# Altium PCB L5_Interface_V1.0.PcbDoc
Units mm, origin at the board's own origin, x right, y up, seen from the top; angles counter-clockwise.
Board outline 90 x 52 mm, 2 copper layers (Top Layer, Bottom Layer); 49 components, 37 nets, 236 pads, 240 vias.
Unrouted connection lines stored in the file: 1.
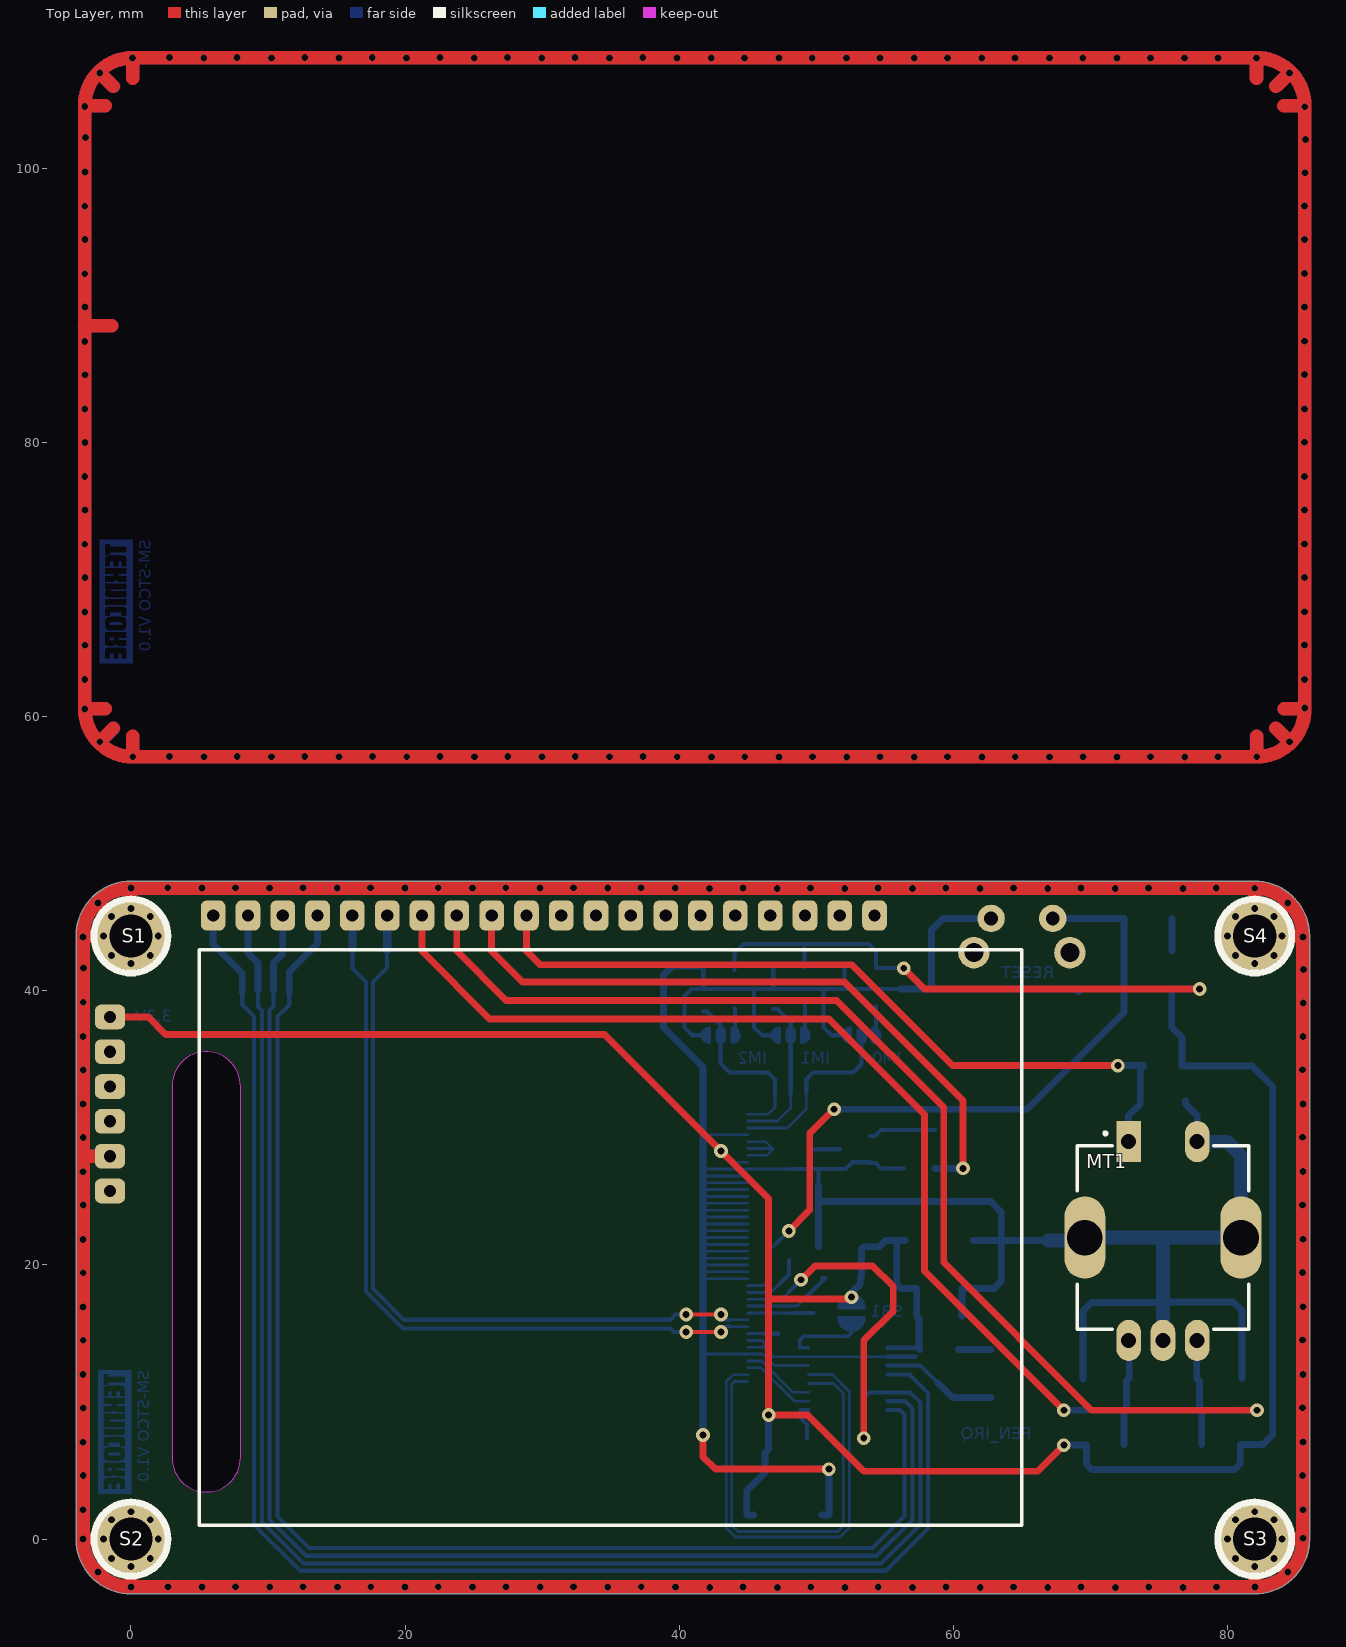
[diagram p0: Top Layer view]
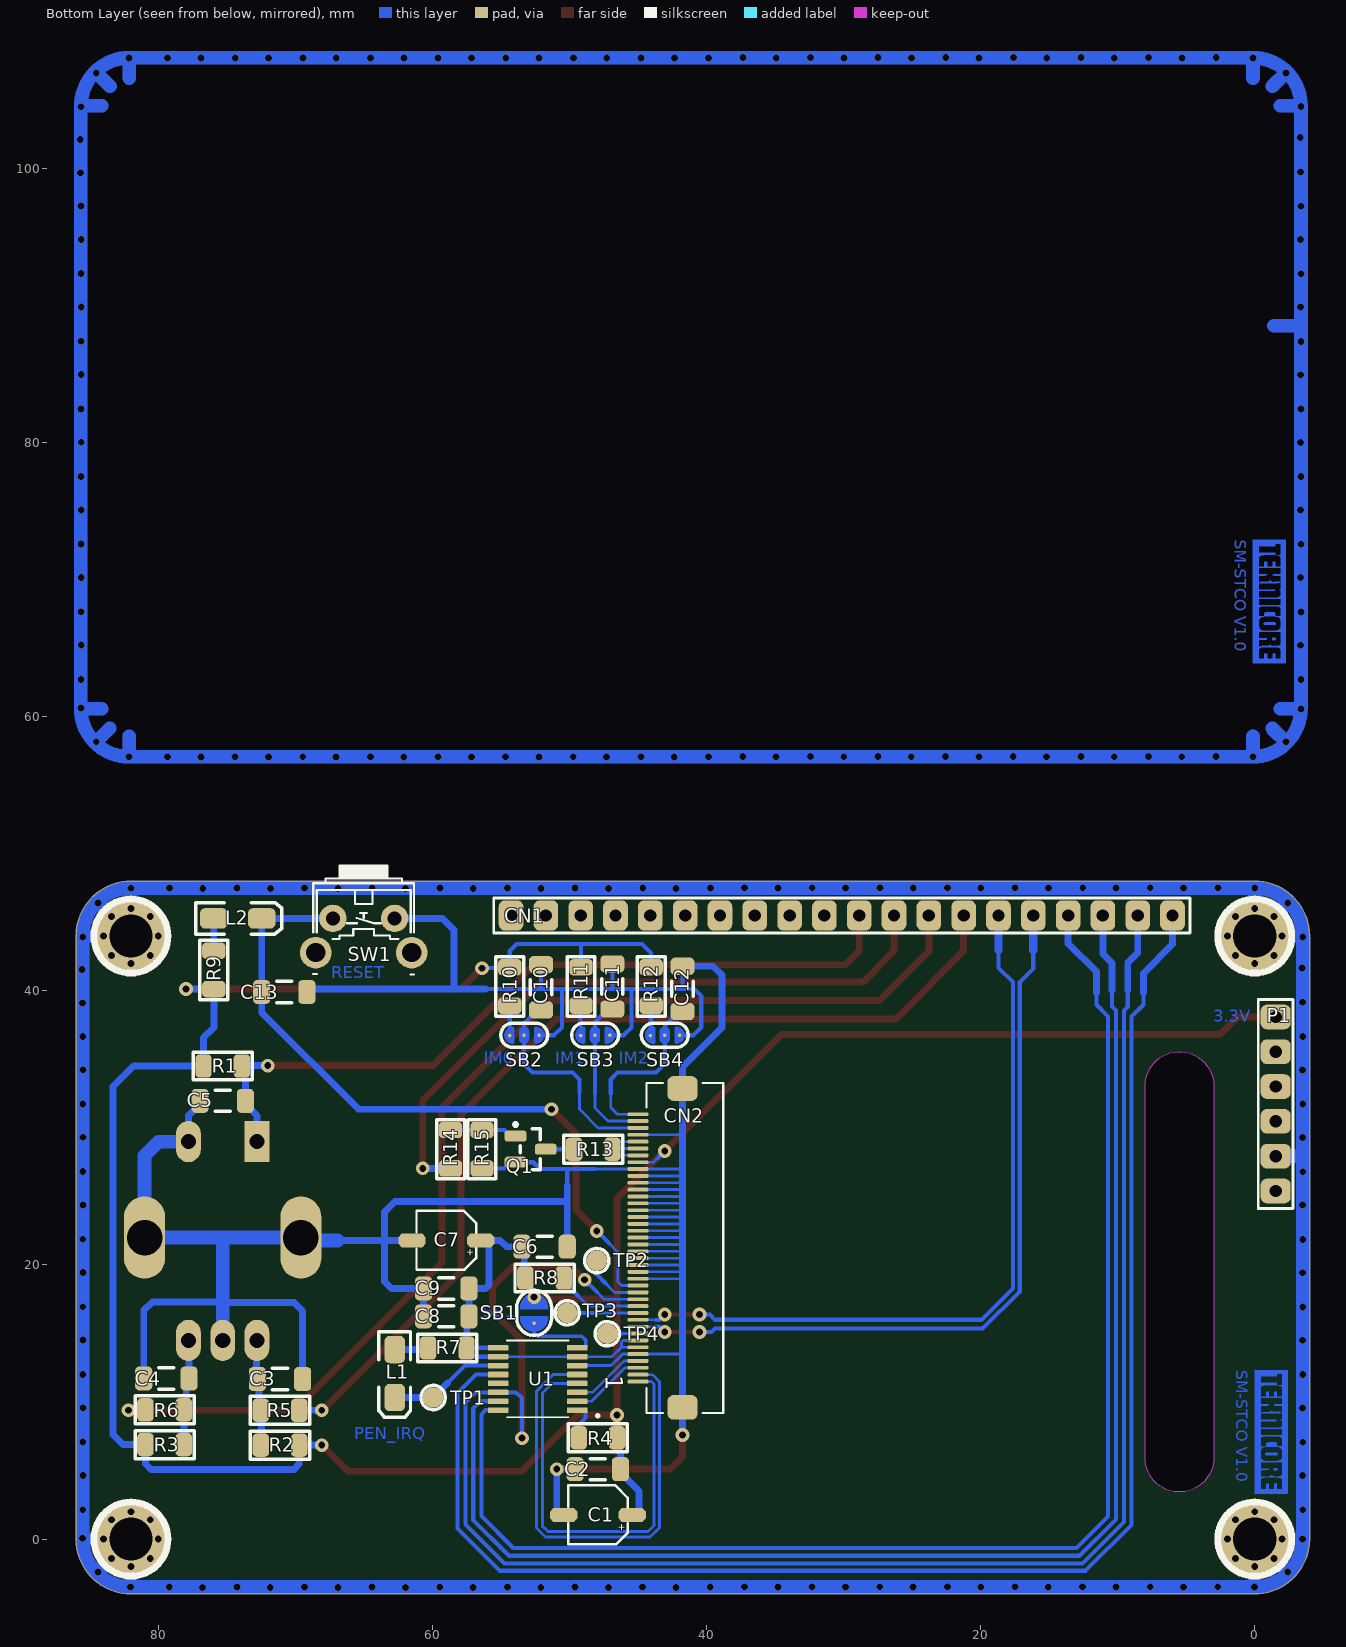
[diagram p1: Bottom Layer view, seen from below]

## Layer stack, top to bottom
Top Solder: solder mask 0.0102, Solder Resist, Dk 3.5
Top Layer: signal copper 0.0356
Dielectric 1: dielectric 0.32, FR-4, Dk 4.8
Bottom Layer: signal copper 0.0356
Bottom Solder: solder mask 0.0102, Solder Resist, Dk 3.5

## Board outline
-4,0 ccw(c0,0) 0,-4 82,-4 ccw(c82,0) 86,0 86,44 ccw(c82,44) 82,48 0,48 ccw(c0,44) -4,44
cut-out: 3,6 ccw(c5.5,5.935) 8,6 8,33 ccw(c5.5,33.065) 3,33

## Design rules (kind name [scope] priority, off if disabled: settings)
Clearance Clearance_1 [All] p1: gap=0.2 ignorepadtopadclearanceinfootprint=FALSE
Clearance [All] p2: gap=0.2 ignorepadtopadclearanceinfootprint=FALSE
PolygonConnect [All] p1: connectstyle=Relief reliefconductorwidth=0.254 reliefentries=4 polygonreliefangle="90 Angle" airgapwidth=0.254
RoutingVias [All] p1: holewidth=0.711 width=1.27 viastyle="Through Hole" minholewidth=0.5 minwidth=0 maxholewidth=0.711 maxwidth=1.27
SolderMaskExpansion [All] p1: expansion=0.102 istentingtop=FALSE
UnConnectedPin [All] p1:
Width [All] p1: maxlimit=5 minlimit=0.2 preferedwidth=0.3
30 further rules are at their usual default settings.

## Components (designator, comment, footprint, x,y, rotation, side; value= is the part's Value field where it differs from the comment)
C1 "10uF/25V" CAP_EL_B 48.273,1.549 r270 bottom
C2 "100nF" CAP1206 47.93,5.105 r180 bottom
C3 "10nF" CAP1206 71.12,11.684 r0 bottom
C4 "10nF" CAP1206 79.413,11.722 r180 bottom
C5 "10nF" CAP1206 75.3,31.979 r180 bottom
C6 "100nF" CAP1206 51.816,21.336 r0 bottom
C7 "10uF/25V" CAP_EL_B 59.33,21.59 r270 bottom
C8 "100nF" CAP1206 58.987,16.256 r180 bottom
C9 "100nF" CAP1206 58.987,18.288 r180 bottom
C10 "100nF" CAP1206 52.07,40.259 r270 bottom
C11 "100nF" CAP1206 46.871,40.321 r270 bottom
C12 "100nF" CAP1206 41.758,40.145 r270 bottom
C13 "100nF" CAP1206 70.806,39.919 r0 bottom
CN1 "Header Male 1x20" "HDR_M_1x20PIN_0.2\"" 30.13,45.5 r0 bottom
CN2 "TFT Display 2.4 inch" "FPC_CONNECTOR HIROSE_FH12A-40S-0.5SH(55)" 43.374,21.246 r270 bottom
L1 "RED" "LED 1206" 62.749,12.081 r270 bottom
L2 "Red" "LED 1206" 74.203,45.29 r180 bottom
MT1 "PEC11R_Rotary Encoder" "PEC11R_Rotary Encoder" 75.3,22 r0 top
P1 "Header Male 1x6" "HDR_M_1X6PIN_0.2\"" -1.524,38.1 r270 bottom
Q1 "SS8050" SOT23_M 52.832,28.448 r180 bottom
R1 "10R" Resistor_SMD_1206 75.3,34.519 r0 bottom
R2 "10R" Resistor_SMD_1206 71.12,6.858 r180 bottom
R3 "10R" Resistor_SMD_1206 79.537,6.896 r0 bottom
R4 "10R" Resistor_SMD_1206 47.93,7.391 r180 bottom
R5 "0R" Resistor_SMD_1206 71.12,9.398 r0 bottom
R6 "0R" Resistor_SMD_1206 79.537,9.436 r180 bottom
R7 "82R" Resistor_SMD_1206 58.912,13.941 r180 bottom
R8 "10K" Resistor_SMD_1206 51.816,19.05 r0 bottom
R9 "82R" Resistor_SMD_1206 75.946,41.526 r270 bottom
R10 "10K" Resistor_SMD_1206 54.356,40.321 r90 bottom
R11 "10K" Resistor_SMD_1206 49.157,40.321 r90 bottom
R12 "10K" Resistor_SMD_1206 44.044,40.321 r90 bottom
R13 "47R" Resistor_SMD_1206 48.26,28.448 r180 bottom
R14 "1K" Resistor_SMD_1206 58.674,28.448 r270 bottom
R15 "10K" Resistor_SMD_1206 56.388,28.448 r90 bottom
S1 "Screw" "SCREW 3MM-INVIRONS 0.254MM" 0,44 r0 top
S2 "Screw" "SCREW 3MM-INVIRONS 0.254MM" 0,0 r0 top
S3 "Screw" "SCREW 3MM-INVIRONS 0.254MM" 82,0 r0 top
S4 "Screw" "SCREW 3MM-INVIRONS 0.254MM" 82,44 r0 top
SB1 "Solder Bridge" "SolderBridge_NC (100x80)(20)mil" 52.578,16.51 r270 bottom
SB2 "Solder Bridge" "SOLDERBRIDGE_SMALL_NC_3PIN (70X50)(20)MIL" 53.315,36.765 r0 bottom
SB3 "Solder Bridge" "SOLDERBRIDGE_SMALL_NC_3PIN (70X50)(20)MIL" 48.141,36.765 r0 bottom
SB4 "Solder Bridge" "SOLDERBRIDGE_SMALL_NC_3PIN (70X50)(20)MIL" 43.053,36.765 r0 bottom
SW1 "Push Button" SW_PushBotton_Right 65.012,45.29 r0 bottom
TP1 "Test Point" TestPoint_SMD_Circle_1.5mm 59.944,10.331 r180 bottom
TP2 "Test Point" TestPoint_SMD_Circle_1.5mm 48.006,20.32 r180 bottom
TP3 "Test Point" TestPoint_SMD_Circle_1.5mm 50.165,16.51 r180 bottom
TP4 "Test Point" TestPoint_SMD_Circle_1.5mm 47.244,14.986 r180 bottom
U1 "XPT2046" TSSOP16 52.324,11.684 r0 bottom

## Footprints (in the part's own frame and the unit in brackets; to place one, negate y for a bottom-side part, rotate by r counter-clockwise, add the part's x,y. Pads: shape width x height; smd on the part's side, far side on the other; paste and mask are expansions set on the pad)
CAP1206 [mm] "Chip Capacitor, 2-Leads, Body 3/20x1/60mm, IPC Medium Density DESIGNER:ABBAS BASEREH"
  rrect50% 1.25x1.75 smd: 1(-1.651,0) 2(1.651,0)
  silkscreen extent -0.55,-0.77 0.55,0.77, body extent -1.65,-0.85 1.65,0.85, height 0.94
CAP_EL_B [mm] "83x83mm"
  oct 1x2 smd: 1(-0.203,2.845) 2(-0.203,-2.159)
  silkscreen extent -2.37,-1.83 1.93,2.51, body extent -2.35,-1.98 1.95,2.62, height 5.4
"FPC_CONNECTOR HIROSE_FH12A-40S-0.5SH(55)" [mil]
  rrect50% 11x59 smd: 1(384,-64) 2(364.03,-64) 3(344.35,-64) 4(324.66,-64) 5(304.98,-64) 6(285.29,-64) 7(265.61,-64) 8(245.92,-64) 9(226.24,-64) 10(206.55,-64) 11(186.87,-64) 12(167.18,-64) 13(147.5,-64) 14(127.81,-64) 15(108.13,-64) 16(88.44,-64) 17(68.76,-64) 18(49.07,-64) 19(29.39,-64) 20(9.7,-64) 21(-9.98,-64) 22(-29.67,-64) 23(-49.35,-64) 24(-69.04,-64) 25(-88.72,-64) 26(-108.41,-64) 27(-128.09,-64) 28(-147.78,-64) 29(-167.46,-64) 30(-187.15,-64) 31(-206.83,-64) 32(-226.52,-64) 33(-246.2,-64) 34(-265.89,-64) 35(-285.57,-64) 36(-305.26,-64) 37(-324.94,-64) 38(-344.63,-64) 39(-364.32,-64) 40(-384,-64)
  rrect50% 71x87 smd: 41(-458,64) 42(458,64)
  silkscreen extent -474,-39 474,181, body extent -482,-69 482,207, height 80
"HDR_M_1X6PIN_0.2\"" [mm] "6 row, straight, gold plating"
  rrect50% 1.8x2.2 hole 0.9: 1(0,0) 2(2.54,0) 3(5.08,0) 4(7.62,0) 5(10.16,0) 6(12.7,0)
  silkscreen extent -1.27,-1.27 13.97,1.27, body extent -1.28,-1.38 13.96,1.54, height 8.61
"HDR_M_1x20PIN_0.2\"" [mm] "2.00 mm THT Pin Header, 20p"
  rrect50% 1.8x2.2 hole 0.9: 1(-24.13,0) 2(-21.59,0) 3(-19.05,0) 4(-16.51,0) 5(-13.97,0) 6(-11.43,0) 7(-8.89,0) 8(-6.35,0) 9(-3.81,0) 10(-1.27,0) 11(1.27,0) 12(3.81,0) 13(6.35,0) 14(8.89,0) 15(11.43,0) 16(13.97,0) 17(16.51,0) 18(19.05,0) 19(21.59,0) 20(24.13,0)
  silkscreen extent -25.4,-1.27 25.4,1.27, body extent -25.39,-1.27 25.4,1.26, height 8.51
"LED 1206" [mm]
  rrect50% 2x1.5 smd: A(-1.75,0) K(1.75,0)
  silkscreen extent -3.05,-1.15 3.2,1.15, body extent -1.65,-0.72 1.65,0.73, height 1.36
"PEC11R_Rotary Encoder" [mm]
  oval 1.8x3 hole 1.1: 1(-2.5,-7.5) 2(0,-7.5) 3(2.5,-7.5) 5(2.5,7)
  rect 1.8x3 hole 1.1: 4(-2.5,7)
  oval 3x6 hole 2.6: S1(-5.7,0) S2(5.7,0)
  silkscreen extent -6.25,-6.7 6.25,7.7, body extent -6.92,-7.6 6.92,7.1, height 21
Resistor_SMD_1206 [mm]
  rrect50% 1.2x1.7 smd: 1(-1.4,0) 2(1.4,0)
  silkscreen extent -2.16,-1.02 2.16,1.02, body extent -1.52,-0.76 1.52,0.76, height 0.6
"SCREW 3MM-INVIRONS 0.254MM" [mm]
  round 0.5 hole 0.5: S(-2,0) S(-1.414,-1.414) S(-1.414,1.414) S(0,-2) S(0,2) S(1.414,-1.414) S(1.414,1.414) S(2,0)
  round 5 hole 3.15 mask+0.1: S(0,0)
  silkscreen extent -2.7,-2.7 2.7,2.7, body extent -2.8,-2.8 2.8,2.8, height 2.58
"SolderBridge_NC (100x80)(20)mil" [mil]
  round 10 smd: 1(-30,0) 2(30,0)
  round 81 on Bottom Solder mask+0: 5(-15,0) 6(15,0)
  Top Layer region: 10,-40 15,-40 30.31,-36.96 43.28,-28.28 51.96,-15.31 55,0 55,0 51.96,15.31 43.28,28.28 30.31,36.96 15,40 15,40 10,40
  Top Layer region: -10,40 -15,40 -30.31,36.96 -43.28,28.28 -51.96,15.31 -55,0 -55,0 -51.96,-15.31 -43.28,-28.28 -30.31,-36.96 -15,-40 -15,-40 -10,-40
  silkscreen extent -65,-50 65,50
"SOLDERBRIDGE_SMALL_NC_3PIN (70X50)(20)MIL" [mil]
  round 10 smd mask+0: 1(-43,0) 2(0,0) 3(41,1)
  round 51 on Bottom Solder mask+0: 3(-33,0) 4(0,0) 4(32,0)
  Top Layer region: -10.02,20.08 -2.37,18.56 4.12,14.22 8.45,7.74 9.98,0.08 9.98,0.08 8.45,-7.57 4.12,-14.06 -2.37,-18.4 -10.02,-19.92 -10.02,-19.92
  Top Layer region: 32,20 39.65,18.48 46.14,14.14 50.48,7.65 52,0 52,0 50.48,-7.65 46.14,-14.14 39.65,-18.48 32,-20 32,-20
  Top Layer region: -33,20 -40.65,18.48 -47.14,14.14 -51.48,7.65 -53,0 -53,0 -51.48,-7.65 -47.14,-14.14 -40.65,-18.48 -33,-20 -33,-20
  Top Layer lines w10: -53,0 ccw(c-33,0) -33,-20 -33,0 -33,20 ccw(c-33,0) -53,0 ; -10.02,10.16 cw(c0,10.16) 0,20.19 cw(c0,10.16) 10.02,10.16 10.02,0 10.02,-10 cw(c0,-10) 0,-20.02 cw(c0,-10) -10.02,-10 -10.02,0 -10.02,10.16 ; 32,20 cw(c32,0) 41,-17.86 cw(c32,0) 32,-20 32,1 32,20
  silkscreen extent -68,-35 67,35
SOT23_M [mm] "SOT23, 3-Leads, Body 2.9x1.3mm, Pitch 0.95mm, Lead Span 2.3mm, IPC Low Density"
  rrect50% 1.6x0.8 smd: 1(-1.1,0.95) 2(-1.1,-0.95) 3(1.1,0)
  silkscreen extent -1.23,-1.5 0.7,1.92, body extent -1.27,-1.5 1.27,1.5, height 1.1
SW_PushBotton_Right [mm] "Horizontal 6.0mm Square Type (Snap-in) SKHH Series; Stem length 3.85 mm ; 1,000,000 cycles ; 0.98N Force"
  round 2 hole 1.016: 1(-2.25,0) 2(2.25,0)
  round 2.3 hole 1.397: MH(-3.5,2.5) MH(3.5,2.5)
  silkscreen extent -3.68,-3.85 3.68,4.09, body extent -4.25,-3.86 4.25,4.04, height 7.43
TestPoint_SMD_Circle_1.5mm [mm]
  round 1.5 smd: 1(0,0)
  silkscreen extent -0.89,-0.89 0.89,0.89
TSSOP16 [mm]
  rrect25% 1.5x0.41 smd: 1(-2.885,2.275) 2(-2.885,1.625) 3(-2.885,0.975) 4(-2.885,0.325) 5(-2.885,-0.325) 6(-2.885,-0.975) 7(-2.885,-1.625) 8(-2.885,-2.275) 9(2.885,-2.275) 10(2.885,-1.625) 11(2.885,-0.975) 12(2.885,-0.325) 13(2.885,0.325) 14(2.885,0.975) 15(2.885,1.625) 16(2.885,2.275)
  silkscreen extent -4.48,-2.8 2.25,2.8, body extent -3.2,-2.5 3.2,2.5, height 1.1

## Part data
C1 C7: library part "Capacitor Electorolytic", "Capacitor Electorolytic"
C2 C3 C4 C5 C6 C8 C9 C10 C11 C12 C13: library part "Capacitor Poliester & Ceramic", "Capacitor Poliester & Ceramic"
CN2: "TFT Display 2.4 inch SPI TFT LCD color screen ILI9341 driver"
L1 L2: library part LED, "LED"
MT1: "Incremental Encoder, 12 Mm, Contact Rating 10 Ma - 5 Vdc", Package=None, Availability=Unavailable, MP=PEC11R-4215F-S0024, Price=None
Q1: "SS8050-G (NPN)"
R1 R2 R3 R4 R5 R6 R7 R8 R9 R10 R11 R12 R13 R14 R15: library part Resistor, "Resistor"
SB1: library part "Solder Bridge Short (NC)", "Solder Bridge Jumper"
SB2 SB3 SB4: library part "Solder Bridge Short 3Pin (NC)", "Solder Bridge Jumper"
SW1: library part "Push Button 4PIN Right", "Push Button 4PIN Right"
TP1 TP2 TP3 TP4: library part TestPoint
U1: "driver IC XPT2046 touch screen controller components"

## Free pads (board coordinates)
  round 1.5 on Mech1: 28(0,44) 28(0.127,104.579) 29(0,0) 29(0.127,60.579) 30(82,0) 30(82.127,60.579) 31(82,44) 31(82.127,104.579) 32(-1.524,38.1) 32(-1.397,98.679) 32(1.27,38.1) 32(1.397,98.679) 32(6.02,42.697) 32(6.147,103.276) 33(6,45.5) 33(6.127,106.079)

## Via types
v1: diameter 0.5, hole 0.5, Top Layer to Bottom Layer, tented both sides, 220 vias
v2: diameter 1, hole 0.5, Top Layer to Bottom Layer, 20 vias

## Nets (pads, with @x,y where several pads share a name; then routed paths per layer and width w, separated by ;. In a path a pad name is that pad's centre, name@x,y a point inside that pad or via, vN(x,y) a via of type N, cw(c..) or ccw(c..) an arc to the next point about the centre after c; other vN are vias at no path point)
+3.3: C1.1 C2.2 C6.2 C7.1 C8.2 C9.2 CN2.6 CN2.7 CN2.33 P1.1 R1.2 R2.2 R3.2 R4.2 R7.2 R8.2 R9.2 R10.2 R11.2 R12.2 SB1.1 U1.7 U1.9 U1.10 | length 241.8
  Top Layer w0.5: P1.1 1.27,38.1 2.54,36.83 34.544,36.83 v2(43.053,28.321) 46.53,24.844 46.53,17.526 ; v2(52.578,17.653) 52.451,17.526 46.53,17.526 ; v2(56.388,41.656) 57.912,40.132 v2(77.978,40.132) ; v2(68.072,6.858) 66.167,4.953 53.467,4.953 49.369,9.051 v2(46.53,9.051) 46.53,17.526
  Bottom Layer w0.2: 43.561,27.813 43.874,27.5 CN2.33 ; CN2.6 46.198,14 ; CN2.7 46.079,14.5 46.198,14.381 46.198,14 ; U1.10 U1.7 46.889,13.309 46.198,14
  Bottom Layer w0.254: v2@52.578,17.399 v2(52.578,17.653)
  Bottom Layer w0.3: v2(43.053,28.321) 43.561,27.813 ; R12.2@44.044,41.545 44.044,42.774 44.704,43.434 49.022,43.434 ; R11.2 49.157,43.299 49.022,43.434 ; U1.10 R7.2@57.257,13.309 ; U1.9 R7.2@57.257,13.959 ; v2(56.388,41.656) 56.385,41.659 54.356,41.659 54.356,42.926 53.848,43.434 49.022,43.434
  Bottom Layer w0.5: C1.1 44.933,1.753 44.933,3.509 46.279,4.855 C2.2 46.279,6.29 46.53,6.541 R4.2 v2(46.53,9.051) ; v2(52.578,17.653) 52.578,17.988 53.216,18.626 R8.2 ; R8.2@53.296,19.13 53.296,21.165 C6.2 54.61,21.336 55.067,21.793 55.626,21.793 C7.1@55.88,21.793 ; C7.1 C7.1@55.88,21.793 ; R7.2@57.587,13.829 57.496,13.92 57.496,16.097 C8.2 C9.2 56.134,18.288 55.88,18.542 C7.1@55.88,21.793 ; v2(68.072,6.858) R2.2 69.72,5.464 70.104,5.08 80.518,5.08 80.937,5.499 R3.2 82.588,6.896 83.312,7.62 83.312,33.02 81.813,34.519 R1.2 76.7,36.584 75.946,37.338 R9.2 77.972,40.126 v2(77.978,40.132)
BL_CTR: CN1.9 R14.2 | length 48.5
  Top Layer w0.5: CN1.9 26.32,42.895 28.562,40.653 52.057,40.653 60.706,32.004 v2(60.706,27.051)
  Bottom Layer w0.5: R14.2 58.677,27.051 v2(60.706,27.051)
GND: C1.2 C2.1 C3.1 C4.1 C5.1 C6.1 C7.2 C8.1 C9.1 C10.1 C11.1 C12.1 C13.1 CN2.5 CN2.16 CN2.17 CN2.18 CN2.19 CN2.20 CN2.21 CN2.22 CN2.23 CN2.24 CN2.25 CN2.26 CN2.27 CN2.28 CN2.29 CN2.30 CN2.31 CN2.32 CN2.37 CN2.41 CN2.42 MT1.2 MT1.5 MT1.S1 MT1.S2 P1.5 Q1.2 R15.1 S1.S S2.S S3.S S4.S SB2.1 SB3.1 SB4.1 SW1.1 U1.6 | length 867.7
  Top Layer w0.5: v2(41.749,7.601) 41.749,6.003 42.647,5.105 v2(50.927,5.105)
  Top Layer w1: v1(-2.402,-2.402) S2.S@-1.414,-1.414 ; v1(-2.402,46.402) S1.S@-1.414,45.414 ; S1.S@-2,44 v1@-3.498,44 ; S2.S@-1.991,0 v1(-3.489,0) ; P1.5 -3.498,27.94 ; S1.S@0,46 v1(0,47.498) ; S2.S@0.009,-2 v1(0.009,-3.498) ; S4.S@82,46 v1(82,47.489) v1@82,47.498 ; v1@82.018,-3.489 S3.S@82.018,-1.991 ; S3.S@83.414,-1.414 v1(84.402,-2.402) v1@84.565,-2.402 ; S4.S@83.414,45.414 v1(84.402,46.402) ; S4.S@84,44 v1@85.498,44 ; S3.S@84.018,0.009 v1@85.516,0.009 ; v1(85.516,43.934) ccw(c82.009,43.991) 82.009,47.498 v1@82,47.498 ; v1@85.525,43.943 85.525,36.683 85.525,34.249 85.525,26.816 85.525,16.949 85.525,7.081 v1(85.525,0.066) cw(c82.018,0.009) v1@84.565,-2.402 ; -3.498,27.94 -3.498,41.674 v1(-3.498,43.943) cw(c0,44) v1@-3.498,44 ; -3.498,27.94 -3.498,21.873 -3.498,7.072 -3.498,0.066 -3.489,0.057 ccw(c0.009,0) v1(-3.489,0) ; v1@-3.498,44 cw(c0,44) v1(0,47.498) ; v1(-3.489,0) ccw(c0.009,0) v1(0.009,-3.498) ; v1(0,47.498) v1(5.188,47.498) v1(15.055,47.498) v1(24.922,47.498) v1(29.855,47.498) v1(34.789,47.498) v1(44.656,47.498) 57.023,47.498 v1(64.391,47.498) 71.824,47.498 v1@82,47.498 ; v1(0.009,-3.498) 7.63,-3.498 12.564,-3.498 17.497,-3.498 v1(19.997,-3.498) v1(29.865,-3.498) 32.298,-3.498 v1(39.732,-3.498) v1(44.665,-3.498) 52.099,-3.498 v1(59.466,-3.498) v1(64.4,-3.498) v1(74.267,-3.498) 76.767,-3.498 v1(82.018,-3.498) ccw(c82.018,0.009) v1@84.565,-2.402
  Bottom Layer w0.2: 41.749,13.5 CN2.5 46.117,13.5 46.217,13.4 46.221,13.4 46.962,12.659 U1.6 ; 41.749,19 CN2.16 ; 41.749,19.5 CN2.17 ; 41.749,20 CN2.18 ; 41.749,20.5 CN2.19 ; 41.749,21 CN2.20 ; 41.749,21.5 CN2.21 ; 41.749,22 CN2.22 ; 41.749,22.5 CN2.23 ; 41.749,23 CN2.24 ; 41.749,23.5 CN2.25 ; 41.749,24 CN2.26 ; 41.749,24.5 CN2.27 ; 41.749,25 CN2.28 ; 41.749,25.5 CN2.29 ; 41.749,26 CN2.30 ; 41.749,26.5 CN2.31 ; 41.749,27 CN2.32 48.184,27 ; 41.749,29.5 CN2.37
  Bottom Layer w0.3: 41.707,36.765 40.959,36.765 40.386,37.338 40.386,39.624 40.894,40.132 41.758,40.132 ; 41.711,36.83 SB4.1@41.939,36.83 ; C12.1 41.758,40.132 ; C11.1 46.871,40.14 46.863,40.132 ; SB3.1 46.795,36.765 46.039,36.765 45.466,37.338 45.466,40.132 ; 48.184,27 50.165,27 ; 50.165,25.819 50.165,27 ; 51.968,36.765 51.119,36.765 50.546,37.338 50.546,40.132 ; 51.974,36.69 SB2.1@52.222,36.69 ; C10.1 52.07,40.132 ; 56.134,40.132 52.07,40.132 ; R15.1 54.74,27.048 54.356,27.432 53.998,27.432 Q1.2 52.644,27.498 52.146,27 50.165,27 ; 41.758,40.132 45.466,40.132 ; 45.466,40.132 46.863,40.132 ; 46.863,40.132 50.546,40.132 ; 50.546,40.132 52.07,40.132
  Bottom Layer w0.5: v2(41.749,7.601) CN2.42 41.749,13.5 41.749,19 41.749,19.5 41.749,20 41.749,20.5 41.749,21 41.749,21.5 41.749,22 41.749,22.5 41.749,23 41.749,23.5 41.749,24 41.749,24.5 41.749,25 41.749,25.5 41.749,26 41.749,26.5 41.749,27 41.749,29.5 CN2.41 41.749,34.451 38.862,37.338 38.862,41.148 39.51,41.796 C12.1 ; C2.1 v2(50.927,5.105) 50.927,1.753 C1.2 ; C6.1 50.165,24.638 ; 50.165,25.819 50.165,24.638 ; 56.134,40.132 58.42,40.132 ; C8.1 C9.1 62.992,18.288 63.5,18.796 63.5,21.793 ; C7.2 63.5,21.793 ; 62.738,47.498 62.762,47.474 ; SW1.1 59.26,45.29 58.42,44.45 58.42,40.132 ; 63.5,22.098 63.5,23.876 62.738,24.638 50.165,24.638 ; 66.929,21.793 63.5,21.793 ; C13.1 68.941,40.132 58.42,40.132 ; C3.1 69.469,16.637 70.104,17.272 75.184,17.272 ; 75.349,17.31 80.429,17.31 81.064,16.675 C4.1 ; C5.1 76.951,31.761 77.8,30.912 MT1.5
  Bottom Layer w1: -3.507,27.94 -3.498,27.94 ; v1@-2.384,-2.411 S2.S@-1.396,-1.423 ; v1@-2.384,46.411 S1.S@-1.396,45.423 ; S2.S@-2,0 v1(-3.489,0) ; S1.S@-2,44 -3.441,44 v1(-3.498,43.943) ; P1.5 -3.498,27.94 ; S2.S@0,-2 0,-3.489 v1(0.009,-3.498) ; S1.S@0,46 v1(0,47.498) ; 66.929,21.793 69.393,21.793 MT1.S1 75.3,22 ; MT1.2 75.3,22 ; MT1.5 79.966,29 81,27.966 MT1.S2 75.3,22 ; v1@82,-3.489 S3.S@82,-2 ; S4.S@82,46 v1(82,47.489) ; S4.S@83.396,45.423 v1@84.384,46.411 ; S3.S@83.414,-1.414 v1(84.402,-2.402) ; S3.S@84,0 v1@85.489,0 ; S4.S@84,44 v1@85.489,44 ; v1(85.516,43.934) ccw(c82.009,43.991) 82.009,47.498 82,47.498 76.758,47.498 v1(69.324,47.498) 62.738,47.498 52.09,47.498 v1(44.656,47.498) 37.223,47.498 27.355,47.498 v1(24.922,47.498) 12.555,47.498 v1(5.188,47.498) v1(0,47.498) ; v1@85.525,43.943 85.525,34.249 85.525,26.816 85.525,14.515 85.525,12.015 v1(85.525,0.066) cw(c82.018,0.009) v1(82.018,-3.498) v1(74.267,-3.498) 61.966,-3.498 v1(59.466,-3.498) v1(54.532,-3.498) v1(44.665,-3.498) v1(34.798,-3.498) v1(29.865,-3.498) v1(24.931,-3.498) 17.497,-3.498 12.564,-3.498 v1(5.197,-3.498) v1(0.009,-3.498) ; -3.498,27.94 -3.498,34.24 -3.498,39.174 v1(-3.498,43.943) ; -3.498,27.94 -3.498,19.439 -3.498,7.072 -3.498,2.139 -3.498,0.066 -3.489,0.057 ccw(c0.009,0) v1(-3.489,0) ; v1(-3.498,43.943) cw(c0,44) v1(0,47.498) ; v1(-3.489,0) ccw(c0.009,0) v1(0.009,-3.498)
  other v1: 42.232,-3.523 47.165,-3.523 52.099,-3.523 57.032,-3.523 61.966,-3.523 66.9,-3.523 71.833,-3.523 76.767,-3.523 10.13,-3.498 15.064,-3.498 49.599,-3.498 69.333,-3.498 79.2,-3.498 2.697,-3.473 7.63,-3.473 12.564,-3.473 17.497,-3.473 22.431,-3.473 27.365,-3.473 32.298,-3.473 37.232,-3.473 -3.496,2.139 85.514,2.148 -3.471,4.639 85.489,4.648 -3.496,7.072 85.514,7.081 -3.471,9.572 85.489,9.581 -3.496,12.006 85.514,12.015 -3.471,14.506 85.489,14.515 -3.496,16.939 85.514,16.949 -3.471,19.439 85.489,19.449 -3.496,21.873 85.514,21.882 -3.471,24.373 85.489,24.382 -3.496,26.807 85.514,26.816 -3.471,29.307 85.489,29.316 -3.496,31.74 85.514,31.749 -3.471,34.24 85.489,34.249 -3.496,36.674 85.514,36.683 85.539,39.117 -3.471,39.174 85.564,41.55 -3.446,41.674 42.223,47.473 47.156,47.473 52.09,47.473 57.023,47.473 61.957,47.473 66.891,47.473 71.824,47.473 76.758,47.473 10.121,47.498 19.988,47.498 39.723,47.498 49.59,47.498 54.523,47.498 59.457,47.498 74.258,47.498 79.191,47.498 2.688,47.523 7.621,47.523 12.555,47.523 17.488,47.523 22.422,47.523 27.355,47.523 32.289,47.523 37.223,47.523
IM0: C10.2 CN2.38 SB2.2 | length 15.6
  Bottom Layer w0.2: CN2.38 47.907,30 49.276,31.369 49.276,32.606
  Bottom Layer w0.3: 49.276,32.606 49.276,33.528 49.784,34.036 52.705,34.036 53.315,34.646 53.315,36.178 ; C10.2 52.324,38.608 53.315,37.617 53.315,37.199 SB2.2@53.315,36.69
IM1: C11.2 CN2.39 SB3.2 | length 10.9
  Bottom Layer w0.2: CN2.39 47.187,30.5 48.141,31.454 48.141,32.512
  Bottom Layer w0.3: C11.2 47.182,38.67 48.141,37.711 48.141,37.274 SB3.2 ; 48.141,32.512 48.141,36.253
IM2: C12.2 CN2.40 SB4.2 | length 12.6
  Bottom Layer w0.2: CN2.40 46.494,31 46.99,31.496 46.99,32.512
  Bottom Layer w0.3: C12.2 42.024,38.494 43.028,37.49 43.028,37.097 43.028,36.589 ; 43.028,36.076 43.028,34.696 43.688,34.036 46.482,34.036 46.99,33.528 46.99,32.512
"LCD_CSX / SPI CSX": CN1.5 CN2.9 | length 56.7
  Top Layer w0.3: v2@40.894,15.113 v2(43.053,15.113)
  Bottom Layer w0.2: 43.688,15.5 CN2.9
  Bottom Layer w0.3: 16.16,42.957 16.16,41.625 17.145,40.64 17.145,18.078 19.856,15.367 39.37,15.367 39.624,15.113 v2(40.513,15.113) ; v2(43.053,15.113) 43.44,15.5 43.688,15.5
  Bottom Layer w0.6: 16.16,42.957 CN1.5
"LCD_DCS / SPI SCL": CN1.6 CN2.10 | length 55.9
  Top Layer w0.3: v2@40.894,16.383 v2(43.053,16.383)
  Bottom Layer w0.2: 43.688,16 CN2.10
  Bottom Layer w0.3: 18.7,42.957 18.7,41.684 17.653,40.637 17.653,18.288 19.939,16.002 39.37,16.002 39.751,16.383 v2(40.513,16.383) ; v2(43.053,16.383) 43.436,16 43.688,16
  Bottom Layer w0.6: 18.7,42.957 CN1.6
LCD_RESET: C13.2 CN2.15 L2.K SW1.2 | length 52.3
  Top Layer w0.5: v2(48.006,22.479) 49.53,24.003 49.53,29.591 v2(51.308,31.369)
  Bottom Layer w0.2: CN2.15 46.186,18.5 46.482,18.796 46.482,20.955 47.117,21.59
  Bottom Layer w0.3: 47.117,21.59 v2(48.006,22.479)
  Bottom Layer w0.5: v2(51.308,31.369) 65.405,31.369 72.457,38.421 C13.2 72.453,39.923 L2.K ; SW1.2 L2.K@72.452,45.29
"LCD_SPI SDI / SDA": CN1.2 CN2.13 U1.14 | length 135.8
  Top Layer w0.5: v2(48.895,18.923) 49.911,19.939 54.102,19.939 55.626,18.415 55.626,16.637 53.467,14.478 v2(53.467,7.366)
  Bottom Layer w0.2: CN2.13 47.472,17.5 48.006,18.034
  Bottom Layer w0.3: 9.271,40.005 9.271,38.832 9.554,38.549 9.554,1.248 12.58,-1.778 54.737,-1.778 57.598,1.083 57.598,9.966 56.855,10.709 U1.14 53.889,10.709 53.467,10.287 v2(53.467,7.366) ; 48.006,18.034 v2(48.895,18.923)
  Bottom Layer w0.5: CN1.2 8.54,42.768 9.271,42.037 9.271,40.005
LCD_X+: CN2.3 U1.2 | length 5.5
  Bottom Layer w0.2: CN2.3 45.964,12.5 48.405,10.059 U1.2
LCD_X-: CN2.1 U1.4 | length 32.6
  Bottom Layer w0.2: CN2.1 44.03,11.493 43.834,11.297 43.834,0.997 44.284,0.547 51.576,0.547 51.968,0.94 51.968,7.391 51.968,10.661 51.271,11.359 U1.4
LCD_Y+: CN2.4 U1.3 | length 5.4
  Bottom Layer w0.2: CN2.4 46.03,13 48.321,10.709 U1.3
LCD_Y-: CN2.2 U1.5 | length 35.4
  Bottom Layer w0.2: CN2.2 43.953,12 43.434,11.481 43.434,0.831 44.118,0.147 51.742,0.147 52.409,0.815 52.409,10.786 51.186,12.009 U1.5
NetC3_2: C3.2 MT1.1 R2.1 R5.2 | length 7.8
  Bottom Layer w0.5: R2.1@72.463,6.896 72.463,9.436 72.644,9.617 72.644,11.528 72.838,11.722 72.838,14.462 MT1.1
NetC4_2: C4.2 MT1.3 R3.1 R6.2 | length 7.8
  Bottom Layer w0.5: MT1.3 77.762,14.462 C4.2 77.956,11.528 77.956,9.617 R6.2 R3.1
NetCN2_8: CN2.8 TP4.1 | length 2.2
  Bottom Layer w0.2: CN2.8 46.228,15
  Bottom Layer w0.3: 46.242,14.986 TP4.1
NetCN2_11: CN2.11 TP3.1 | length 4.8
  Bottom Layer w0.2: CN2.11 48.26,16.5
  Bottom Layer w0.3: 48.26,16.5 TP3.1@49.784,16.5
NetCN2_12: CN2.12 R8.1 | length 6.8
  Bottom Layer w0.2: CN2.12 48.616,17 49.336,17.72
  Bottom Layer w0.3: 49.336,17.72 50.666,19.05 R8.1
NetCN2_14: CN2.14 TP2.1 | length 4.6
  Bottom Layer w0.2: CN2.14 45.857,18 46.702,18 47.354,18.652
  Bottom Layer w0.3: 47.354,18.652 48.006,19.304 TP2.1
NetCN2_34: CN2.34 CN2.35 CN2.36 R13.2 | length 5.9
  Bottom Layer w0.2: CN2.34 46.412,28 R13.2 R13.2@46.808,28.5 ; CN2.35 R13.2@46.808,28.5 ; CN2.36 46.308,29 R13.2@46.808,28.5
NetL1_A: L1.A R7.1 | length 2.4
  Bottom Layer w0.5: R7.1@60.387,13.829 60.987,13.829 60.99,13.831 L1.A
NetL2_A: L2.A R9.1 | length 2.4
  Bottom Layer w0.5: R9.1 75.953,42.933 L2.A
NetQ1_1: Q1.1 R14.1 R15.2 | length 4.9
  Bottom Layer w0.3: Q1.1 54.29,29.398 54.74,29.848 R15.2 R14.1
NetQ1_3: Q1.3 R13.1 | length 2.1
  Bottom Layer w0.3: R13.1 Q1.3
NetR4_1: R4.1 U1.1 | length 2.8
  Bottom Layer w0.3: R4.1 49.33,8.363 48.844,8.848 48.844,9.409 U1.1
NetR10_1: R10.1 SB2.3@54.356,36.74 | length 2.2
  Bottom Layer w0.3: SB2.3@54.356,36.665 54.356,37.144 R10.1@54.356,38.859
NetR11_1: R11.1 SB3.3@49.183,36.74 | length 2.2
  Bottom Layer w0.3: R11.1 49.183,38.896 49.183,37.219 SB3.3@49.183,36.74
NetR12_1: R12.1 SB4.3@44.094,36.74 | length 2.2
  Bottom Layer w0.3: R12.1@44.044,38.745 44.069,38.719 44.069,37.042 44.069,36.563
NetSB1_2: SB1.2 U1.8 | length 6
  Bottom Layer w0.254: U1.8 48.817,13.959 48.817,14.527 49.092,14.802 52.324,14.802 52.578,15.056 52.578,15.621 52.578,15.875 52.527,15.875
ROT_CLK: CN1.7 R5.1 | length 71.7
  Top Layer w0.5: CN1.7 21.24,42.895 26.176,37.959 50.941,37.959 57.912,30.988 57.912,19.558 v2(68.072,9.398)
  Bottom Layer w0.5: v2(68.072,9.398) R5.1
ROT_DT: CN1.8 R6.1 | length 82.7
  Top Layer w0.5: CN1.8 23.78,42.895 27.369,39.306 51.499,39.306 59.309,31.496 59.309,20.193 70.104,9.398 v2(82.169,9.398)
  Bottom Layer w0.5: R6.1 80.975,9.398 v2(82.169,9.398)
ROT_SW: C5.2 CN1.10 MT1.4 R1.1 | length 57.1
  Top Layer w0.5: CN1.10 28.86,42.895 29.845,41.91 52.578,41.91 59.944,34.544 v2(72.009,34.544)
  Bottom Layer w0.5: v2(72.009,34.544) 73.875,34.544 R1.1 73.649,34.268 C5.2 73.649,31.739 72.8,30.89 MT1.4
T_CLK: CN1.4 U1.16 | length 101.5
  Bottom Layer w0.3: 11.557,39.878 11.557,39.243 11.557,38.989 10.697,38.129 10.697,1.664 12.996,-0.635 54.102,-0.635 56.43,1.693 56.43,9.102 56.123,9.409 U1.16
  Bottom Layer w0.5: 11.557,39.878 11.557,41.402 13.62,43.465 CN1.4
T_CS: CN1.3 U1.15 | length 103.7
  Bottom Layer w0.3: 10.414,40.005 10.414,38.876 10.117,38.579 10.117,1.446 12.778,-1.215 54.411,-1.215 57.024,1.398 57.024,9.519 56.484,10.059 U1.15
  Bottom Layer w0.5: 10.414,40.005 10.414,42.037 11.08,42.703 CN1.3
T_DO: CN1.1 U1.12 | length 110.9
  Bottom Layer w0.3: 8.128,39.878 8.128,38.989 8.995,38.122 8.995,1.038 12.337,-2.304 55.1,-2.304 58.166,0.762 58.166,10.668 56.825,12.009 U1.12
  Bottom Layer w0.5: CN1.1 6,43.403 8.128,41.275 8.128,39.878
T_IRQ: L1.K TP1.1 U1.11 | length 8.5
  Bottom Layer w0.3: U1.11 57.616,12.659 58.887,11.389
  Bottom Layer w0.5: 58.887,11.389 TP1.1 L1.K
pads on no net: CN1.11 CN1.12 CN1.13 CN1.14 CN1.15 CN1.16 CN1.17 CN1.18 CN1.19 CN1.20 P1.2 P1.3 P1.4 P1.6 SB1.5 SB1.6 SB2.3@52.476,36.765 SB2.4 SB3.3@47.303,36.765 SB3.4 SB4.3@42.215,36.765 SB4.4 SW1.MH U1.13
copper on no net: | length 587.3
  Top Layer w1: v1(-2.275,58.177) -1.287,59.165 ; v1(-2.275,106.981) -1.287,105.993 ; -1.873,104.579 v1@-3.371,104.579 ; -1.864,60.579 v1(-3.362,60.579) ; -1.397,88.519 -3.371,88.519 ; 0.127,106.579 v1(0.127,108.077) ; 0.136,58.579 v1(0.136,57.081) ; 82.127,106.579 v1(82.127,108.068) v1@82.127,108.077 ; v1@82.145,57.09 82.145,58.588 ; 83.541,59.165 v1(84.529,58.177) v1@84.692,58.177 ; 83.541,105.993 v1(84.529,106.981) ; 84.127,104.579 v1@85.625,104.579 ; 84.145,60.588 v1@85.643,60.588 ; v1(85.643,104.513) ccw(c82.136,104.57) 82.136,108.077 v1@82.127,108.077 ; v1@85.652,104.522 85.652,97.262 85.652,94.828 85.652,87.395 85.652,77.528 85.652,67.66 v1(85.652,60.645) cw(c82.145,60.588) v1@84.692,58.177 ; -3.371,88.519 -3.371,82.452 -3.371,67.651 -3.371,60.645 -3.362,60.636 ccw(c0.136,60.579) v1(-3.362,60.579) ; -3.371,88.519 -3.371,102.253 v1(-3.371,104.522) cw(c0.127,104.579) v1@-3.371,104.579 ; v1@-3.371,104.579 cw(c0.127,104.579) v1(0.127,108.077) ; v1(-3.362,60.579) ccw(c0.136,60.579) v1(0.136,57.081) ; v1(0.127,108.077) v1(5.315,108.077) v1(15.182,108.077) v1(25.049,108.077) v1(29.982,108.077) v1(34.916,108.077) v1(44.783,108.077) 57.15,108.077 v1(64.518,108.077) 71.951,108.077 v1@82.127,108.077 ; v1(0.136,57.081) 7.757,57.081 12.691,57.081 17.624,57.081 v1(20.124,57.081) v1(29.992,57.081) 32.425,57.081 v1(39.859,57.081) v1(44.792,57.081) 52.226,57.081 v1(59.593,57.081) v1(64.527,57.081) v1(74.394,57.081) 76.894,57.081 v1(82.145,57.081) ccw(c82.145,60.588) v1@84.692,58.177
  Bottom Layer w0.5: 62.865,108.077 62.889,108.053
  Bottom Layer w1: -3.38,88.519 -3.371,88.519 ; v1@-2.257,58.168 -1.269,59.156 ; v1@-2.257,106.99 -1.269,106.002 ; -1.873,60.579 v1(-3.362,60.579) ; -1.873,104.579 -3.314,104.579 v1(-3.371,104.522) ; -1.397,88.519 -3.371,88.519 ; 0.127,58.579 0.127,57.09 v1(0.136,57.081) ; 0.127,106.579 v1(0.127,108.077) ; v1@82.127,57.09 82.127,58.579 ; 82.127,106.579 v1(82.127,108.068) ; 83.523,106.002 v1@84.511,106.99 ; 83.541,59.165 v1(84.529,58.177) ; 84.127,60.579 v1@85.616,60.579 ; 84.127,104.579 v1@85.616,104.579 ; v1(85.643,104.513) ccw(c82.136,104.57) 82.136,108.077 82.127,108.077 76.885,108.077 v1(69.451,108.077) 62.865,108.077 52.217,108.077 v1(44.783,108.077) 37.35,108.077 27.482,108.077 v1(25.049,108.077) 12.682,108.077 v1(5.315,108.077) v1(0.127,108.077) ; v1@85.652,104.522 85.652,94.828 85.652,87.395 85.652,75.094 85.652,72.594 v1(85.652,60.645) cw(c82.145,60.588) v1(82.145,57.081) v1(74.394,57.081) 62.093,57.081 v1(59.593,57.081) v1(54.659,57.081) v1(44.792,57.081) v1(34.925,57.081) v1(29.992,57.081) v1(25.058,57.081) 17.624,57.081 12.691,57.081 v1(5.324,57.081) v1(0.136,57.081) ; -3.371,88.519 -3.371,80.018 -3.371,67.651 -3.371,62.718 -3.371,60.645 -3.362,60.636 ccw(c0.136,60.579) v1(-3.362,60.579) ; -3.371,88.519 -3.371,94.819 -3.371,99.753 v1(-3.371,104.522) ; v1(-3.371,104.522) cw(c0.127,104.579) v1(0.127,108.077) ; v1(-3.362,60.579) ccw(c0.136,60.579) v1(0.136,57.081)
  other v1: 42.359,57.056 47.292,57.056 52.226,57.056 57.159,57.056 62.093,57.056 67.027,57.056 71.96,57.056 76.894,57.056 10.257,57.081 15.191,57.081 49.726,57.081 69.46,57.081 79.327,57.081 2.824,57.106 7.757,57.106 12.691,57.106 17.624,57.106 22.558,57.106 27.492,57.106 32.425,57.106 37.359,57.106 -3.369,62.718 85.641,62.727 -3.344,65.218 85.616,65.227 -3.369,67.651 85.641,67.66 -3.344,70.151 85.616,70.16 -3.369,72.585 85.641,72.594 -3.344,75.085 85.616,75.094 -3.369,77.518 85.641,77.528 -3.344,80.018 85.616,80.028 -3.369,82.452 85.641,82.461 -3.344,84.952 85.616,84.961 -3.369,87.386 85.641,87.395 -3.344,89.886 85.616,89.895 -3.369,92.319 85.641,92.328 -3.344,94.819 85.616,94.828 -3.369,97.253 85.641,97.262 85.666,99.696 -3.344,99.753 85.691,102.129 -3.319,102.253 42.35,108.052 47.283,108.052 52.217,108.052 57.15,108.052 62.084,108.052 67.018,108.052 71.951,108.052 76.885,108.052 10.248,108.077 20.115,108.077 39.85,108.077 49.717,108.077 54.65,108.077 59.584,108.077 74.385,108.077 79.318,108.077 2.815,108.102 7.748,108.102 12.682,108.102 17.615,108.102 22.549,108.102 27.482,108.102 32.416,108.102 37.35,108.102

## Other copper
Bottom Layer:
  region: 5 vertices and 9 holes, not listed, extent -2.276,63.895 0.13,72.915
  region: -0.718,66.715 -0.73,66.715 -0.73,66.709 -1.464,66.709 -1.464,66.715 -1.488,66.715 -1.488,66.721 -1.5,66.721 -1.5,66.727 -1.512,66.727 -1.512,66.733 -1.518,66.733 -1.518,66.739 -1.524,66.739 -1.524,66.745 -1.53,66.745 -1.53,66.751 -1.536,66.751 -1.536,66.763 -1.542,66.763 -1.542,66.775 -1.548,66.775 -1.548,66.811 -1.542,66.811 -1.542,66.824 -1.536,66.824 -1.536,66.836 -1.53,66.836 -1.53,66.848 -1.524,66.848 -1.524,66.854 -1.512,66.854 -1.512,66.86 -1.506,66.86 -1.506,66.866 -1.494,66.866 -1.494,66.872 -1.476,66.872 -1.476,66.878 -1.434,66.878 -1.434,66.884 -0.76,66.884 -0.76,66.878 -0.718,66.878 -0.718,66.872 -0.7,66.872 -0.7,66.866 -0.694,66.866 -0.694,66.86 -0.682,66.86 -0.682,66.854 -0.676,66.854 -0.676,66.848 -0.67,66.848 -0.67,66.842 -0.664,66.842 -0.664,66.836 -0.658,66.836 -0.658,66.824 -0.652,66.824 -0.652,66.769 -0.658,66.769 -0.658,66.757 -0.664,66.757 -0.664,66.745 -0.67,66.745 -0.67,66.739 -0.676,66.739 -0.676,66.733 -0.682,66.733 -0.682,66.727 -0.694,66.727 -0.694,66.721 -0.706,66.721 -0.706,66.715 -0.712,66.715
  region: -1.428,65.759 -1.265,65.759 -1.265,65.663 -1.271,65.663 -1.271,65.639 -1.277,65.639 -1.277,65.627 -1.283,65.627 -1.283,65.615 -1.289,65.615 -1.289,65.609 -1.301,65.609 -1.301,65.603 -1.307,65.603 -1.307,65.597 -1.331,65.597 -1.331,65.591 -1.392,65.591 -1.392,65.585 -1.398,65.585 -1.398,65.591 -1.458,65.591 -1.458,65.597 -1.476,65.597 -1.476,65.603 -1.488,65.603 -1.488,65.609 -1.5,65.609 -1.5,65.615 -1.506,65.615 -1.506,65.621 -1.512,65.621 -1.512,65.633 -1.518,65.633 -1.518,65.645 -1.524,65.645 -1.524,65.669 -1.53,65.669 -1.53,65.759 -1.434,65.759
  region: -1.546,5.18 -1.383,5.18 -1.383,5.084 -1.389,5.084 -1.389,5.06 -1.395,5.06 -1.395,5.048 -1.401,5.048 -1.401,5.036 -1.407,5.036 -1.407,5.03 -1.419,5.03 -1.419,5.024 -1.425,5.024 -1.425,5.018 -1.449,5.018 -1.449,5.012 -1.51,5.012 -1.51,5.006 -1.516,5.006 -1.516,5.012 -1.576,5.012 -1.576,5.018 -1.594,5.018 -1.594,5.024 -1.606,5.024 -1.606,5.03 -1.618,5.03 -1.618,5.036 -1.624,5.036 -1.624,5.042 -1.63,5.042 -1.63,5.054 -1.636,5.054 -1.636,5.066 -1.642,5.066 -1.642,5.09 -1.648,5.09 -1.648,5.18 -1.552,5.18
  region: -0.836,6.136 -0.848,6.136 -0.848,6.13 -1.582,6.13 -1.582,6.136 -1.606,6.136 -1.606,6.142 -1.618,6.142 -1.618,6.148 -1.63,6.148 -1.63,6.154 -1.636,6.154 -1.636,6.16 -1.642,6.16 -1.642,6.166 -1.648,6.166 -1.648,6.173 -1.654,6.173 -1.654,6.185 -1.66,6.185 -1.66,6.197 -1.666,6.197 -1.666,6.233 -1.66,6.233 -1.66,6.245 -1.654,6.245 -1.654,6.257 -1.648,6.257 -1.648,6.269 -1.642,6.269 -1.642,6.275 -1.63,6.275 -1.63,6.281 -1.624,6.281 -1.624,6.287 -1.612,6.287 -1.612,6.293 -1.594,6.293 -1.594,6.299 -1.552,6.299 -1.552,6.305 -0.878,6.305 -0.878,6.299 -0.836,6.299 -0.836,6.293 -0.818,6.293 -0.818,6.287 -0.812,6.287 -0.812,6.281 -0.8,6.281 -0.8,6.275 -0.794,6.275 -0.794,6.269 -0.788,6.269 -0.788,6.263 -0.782,6.263 -0.782,6.257 -0.776,6.257 -0.776,6.245 -0.77,6.245 -0.77,6.191 -0.776,6.191 -0.776,6.179 -0.782,6.179 -0.782,6.166 -0.788,6.166 -0.788,6.16 -0.794,6.16 -0.794,6.154 -0.8,6.154 -0.8,6.148 -0.812,6.148 -0.812,6.142 -0.824,6.142 -0.824,6.136 -0.83,6.136
  region: 5 vertices and 9 holes, not listed, extent -2.393,3.316 0.012,12.336
  text "SM-STCO V1.0" at 1.759,72.902 h1.4 r90
  text "RESET" at 67.374,40.625 h1.5
  text "3.3V" at 3.024,37.45 h1.5
  text "IM2" at 46.413,34.408 h1.5
  text "IM1" at 51.034,34.408 h1.5
  text "IM0" at 56.241,34.408 h1.5
  text "SB1" at 56.341,15.91 h1.5
  text "SM-STCO V1.0" at 1.641,12.323 h1.4 r90
  text "PEN_IRQ" at 65.711,6.997 h1.5

## Silkscreen, mask and mechanical layers (free items; w line width, h text height)
Top Overlay:
  lines w0.254: 5,1 65,1 65,43 5,43 5,1
Mechanical 1:
  lines w0.254: -7,-4 -2,-4 ; -7,48 -2,48 ; -6.873,56.579 -1.873,56.579 ; -6.873,108.579 -1.873,108.579 ; -4,-7 -4,-2 ; -3.873,53.579 -3.873,58.579 ; 86,-6.746 86,-1.746 ; 86.127,53.833 86.127,58.833 ; -4,0 ccw(c0,0) 0,-4 82,-4 ccw(c82,0) 86,0 86,44 ccw(c82,44) 82,48 0,48 ccw(c0,44) -4,44 -4,0 ; -3.873,60.579 ccw(c0.127,60.579) 0.127,56.579 82.127,56.579 ccw(c82.127,60.579) 86.127,60.579 86.127,104.579 ccw(c82.127,104.579) 82.127,108.579 0.127,108.579 ccw(c0.127,104.579) -3.873,104.579 -3.873,60.579 ; -2.54,3.302 -2.54,12.446 1.778,12.446 1.778,3.302 -2.54,3.302 ; 3,6 ccw(c5.5,5.935) 8,6 8,33 ccw(c5.5,33.065) 3,33 3,6
  lines w0.381: -7.667,-2 -7,-4 ; -7.667,46 -7,48 ; -7.54,58.579 -6.873,56.579 ; -7.54,106.579 -6.873,108.579 ; -7.254,-4 -6.746,-4 ; -7.254,48 -6.746,48 ; -7.127,56.579 -6.619,56.579 ; -7.127,108.579 -6.619,108.579 ; -7,18.403 -7,-4 ; -7,25.597 -7,48 ; -6.873,78.982 -6.873,56.579 ; -6.873,86.176 -6.873,108.579 ; -6.333,-2 -7,-4 ; -6.333,46 -7,48 ; -6.206,58.579 -6.873,56.579 ; -6.206,106.579 -6.873,108.579 ; -4,-7.254 -4,-6.746 ; -3.873,53.325 -3.873,53.833 ; -2,-7.667 -4,-7 ; -2,-6.333 -4,-7 ; -1.873,52.912 -3.873,53.579 ; -1.873,54.246 -3.873,53.579 ; 37.392,-7 -4,-7 ; 37.519,53.579 -3.873,53.579 ; 44.608,-7 86,-7 ; 44.735,53.579 86.127,53.579 ; 84,-7.667 86,-7 ; 84,-6.333 86,-7 ; 84.127,52.912 86.127,53.579 ; 84.127,54.246 86.127,53.579 ; 86,-7.254 86,-6.746 ; 86.127,53.325 86.127,53.833
  text "52 (mm)" at -6.033,79.236 h2 r90
  text "90 (mm)" at 37.773,52.739 h2
  text "52 (mm)" at -6.16,18.657 h2 r90
  text "90 (mm)" at 37.646,-7.84 h2

## Text inside footprints (layer, text, board x,y; h text height)
C1: Bottom Overlay "+" at 46.393,1.168 h0.52 r90; Mechanical 15 "8.3x8.3mm" at 50.051,3.81 h0.15 r90
C7: Bottom Overlay "+" at 57.451,21.209 h0.52 r90; Mechanical 15 "8.3x8.3mm" at 61.108,23.851 h0.15 r90
CN2: Mechanical 13 "1" at 47.387,11.974 h1.27 r90; Bottom Overlay "1" at 47.336,11.942 h1.27 r90